# Altium PCB PCB.PcbDoc
Units mm, origin at the board's own origin, x right, y up, seen from the top; angles counter-clockwise.
Board outline 28 x 28 mm, 10 copper layers (Top, L2 (HS), L3 (GND), L4 (VCC), L5 (S), L6 S(), L7 (VCC), L8 (GND), L9 (VCC), Bottom), stack 1.141 mm thick; 137 components, 69 nets, 586 pads, 270 vias.
Unrouted connection lines stored in the file: 209.
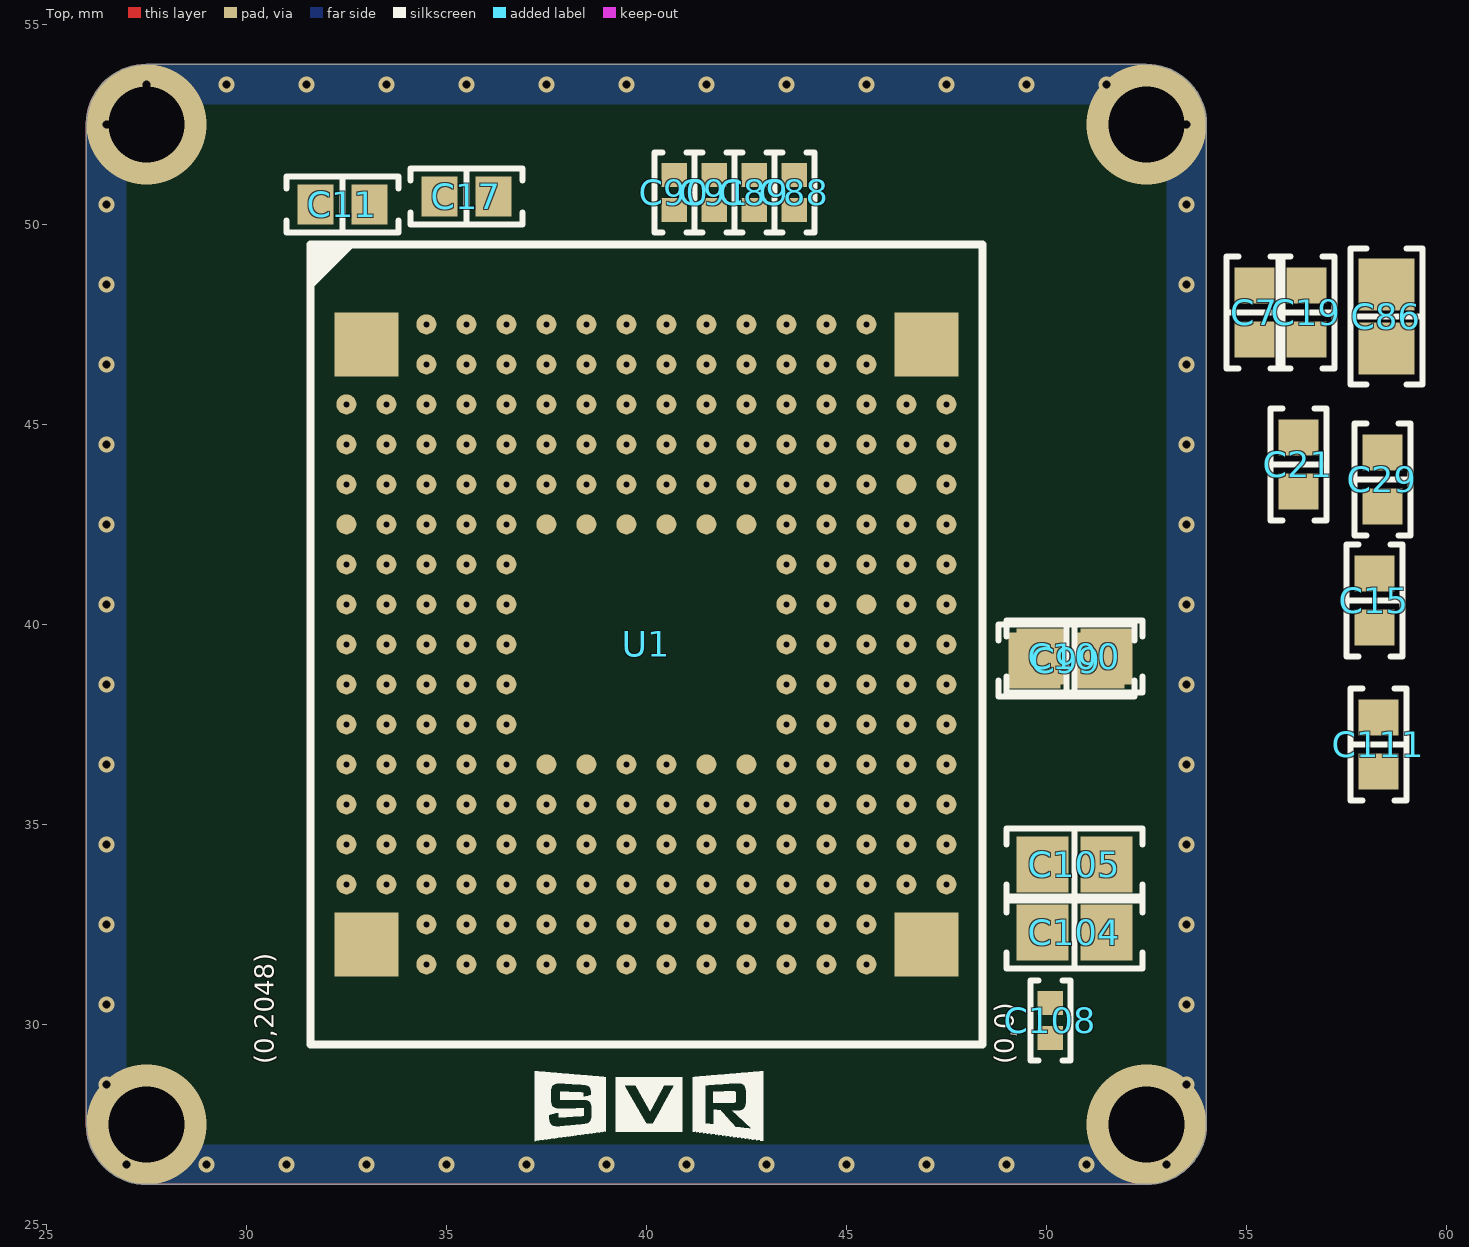
[diagram p0: Top view]
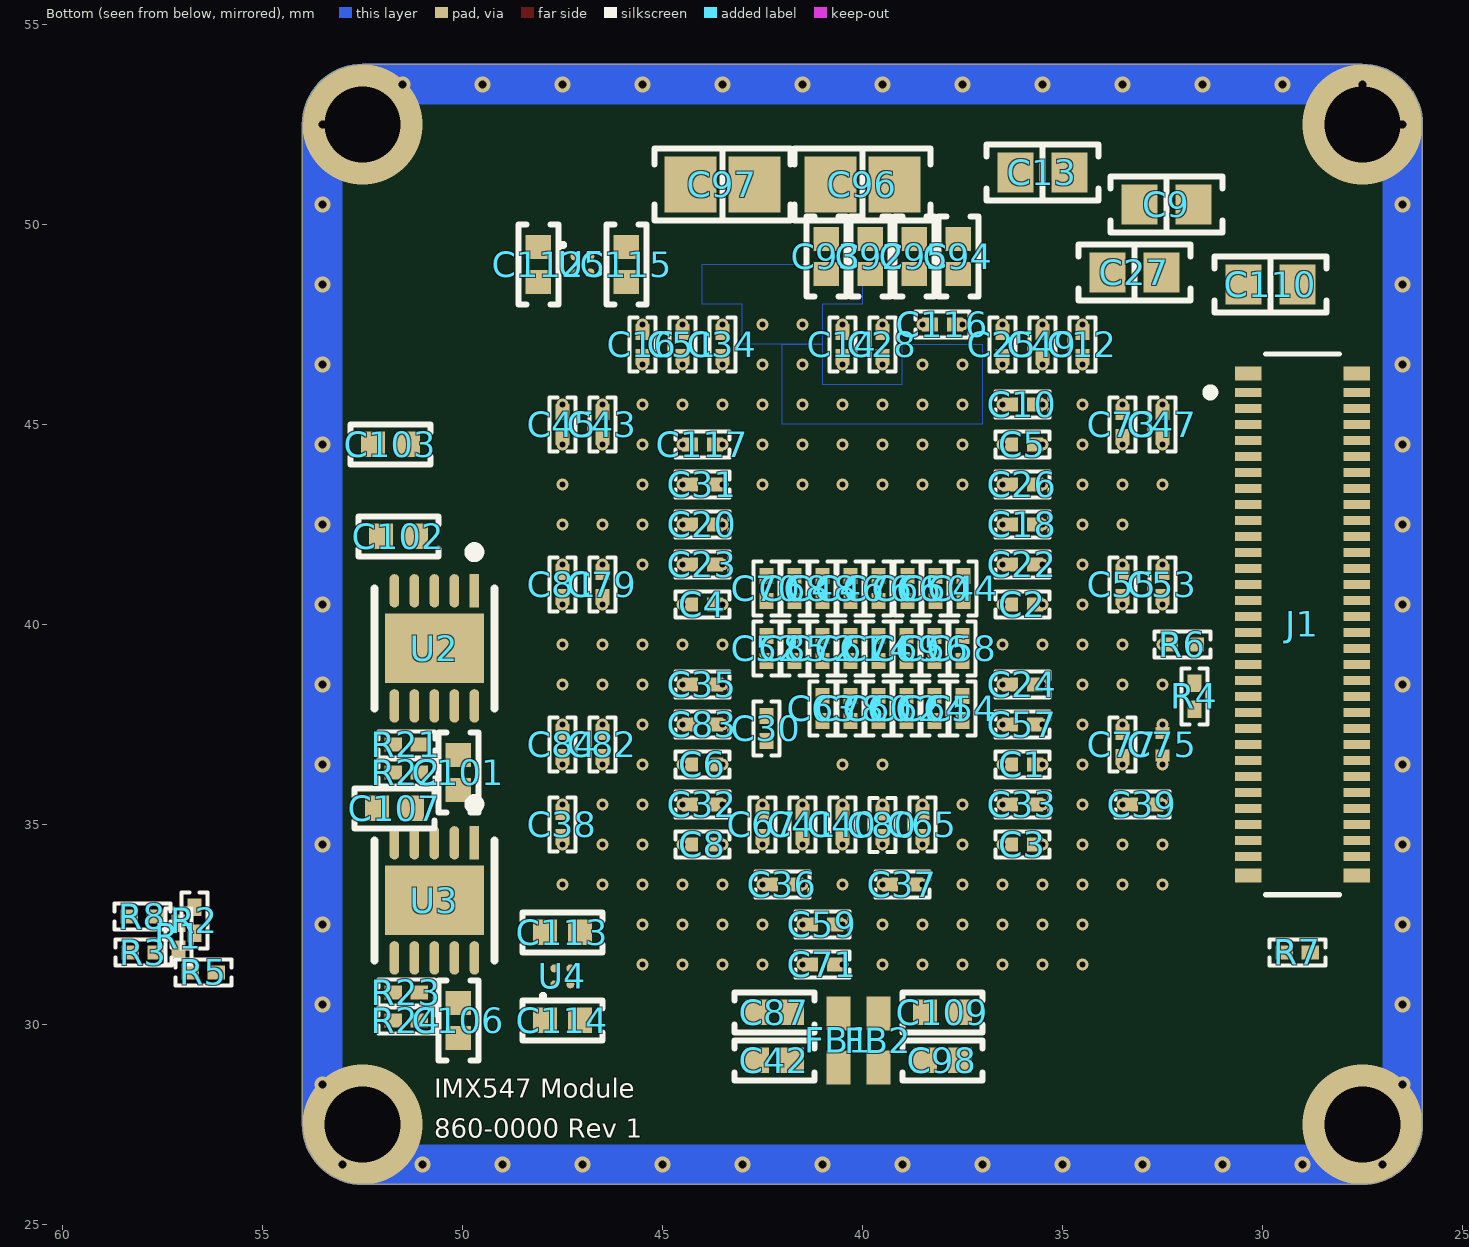
[diagram p1: Bottom view, seen from below]
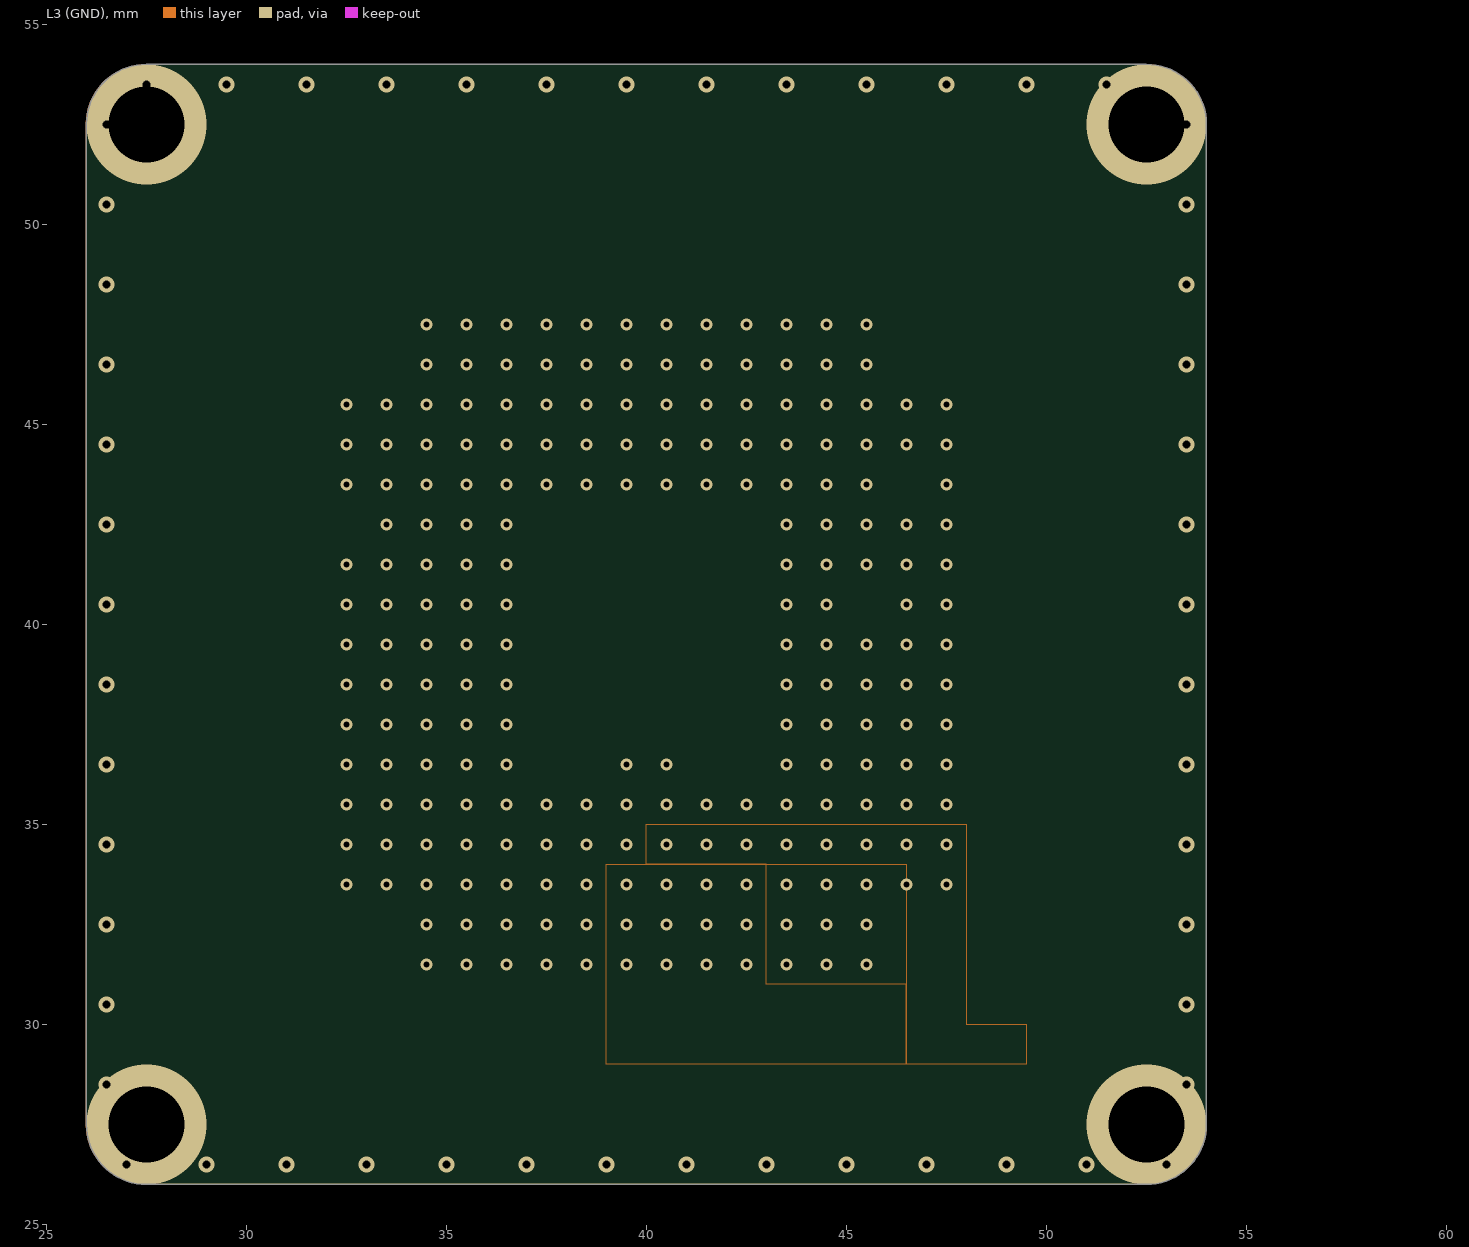
[diagram p2: L3 (GND)]

## Layer stack, top to bottom
Top Solder: solder mask 0.012, WE-SM-0001, Dk 3.5
Top: signal copper 0.035
Dielectric 1: prepreg 0.09, WE-PP-0034, Dk 4.6
L2 (HS): signal copper 0.0175
Dielectric 2: prepreg 0.127, WE-PP-0035, Dk 4.6
L3 (GND): signal copper 0.0175
Dielectric 8: prepreg 0.05, PP-006, Dk 4.6
L4 (VCC): signal copper 0.0175
Dielectric 3: prepreg 0.076, WE-PP-0035, Dk 4.6
L5 (S): signal copper 0.0175
Dielectric 6: core 0.25, Core-009, Dk 4.6
L6 S(): signal copper 0.0175
Dielectric 7: prepreg 0.076, PP-006, Dk 4.6
L7 (VCC): signal copper 0.0175
Dielectric 9: prepreg 0.05, PP-006, Dk 4.6
L8 (GND): signal copper 0.0175
Dielectric 4: prepreg 0.127, WE-PP-0035, Dk 4.6
L9 (VCC): signal copper 0.0175
Dielectric 5: prepreg 0.09, WE-PP-0034, Dk 4.6
Bottom: signal copper 0.03
Bottom Solder: solder mask 0.012, WE-SM-0001, Dk 3.5

## Board outline
26,27.5 26,52.5 cw(c27.5,52.5) 27.5,54 52.5,54 cw(c52.5,52.5) 54,52.5 54,27.5 cw(c52.5,27.5) 52.5,26 27.5,26 cw(c27.5,27.5)

## Design rules (kind name [scope] priority, off if disabled: settings)
Clearance Clearance_1 [All] p1: gap=0.1 ignorepadtopadclearanceinfootprint=TRUE except(0.35: Arc-Arc Arc-Track Track-Track)
Clearance [All] p2: gap=0.1 ignorepadtopadclearanceinfootprint=FALSE
DiffPairsRouting [All] p1: maxlimit=0.254 minlimit=0.127 mostfreqgap=0.254 toplayer_maxgap=0.127 toplayer_prefgap=0.127 toplayer_minwidth=0.156 toplayer_maxwidth=0.156 toplayer_prefwidth=0.156 midlayer1_mingap=0.13 midlayer1_maxgap=0.13 midlayer1_prefgap=0.13 midlayer1_minwidth=0.075 midlayer1_maxwidth=0.075 midlayer1_prefwidth=0.075 midlayer2_mingap=0.13 midlayer2_maxgap=0.13 midlayer2_prefgap=0.13 midlayer2_minwidth=0.075 midlayer2_maxwidth=0.075 midlayer2_prefwidth=0.075 midlayer3_minwidth=0.381 midlayer3_maxwidth=0.381 midlayer3_prefwidth=0.381 midlayer4_minwidth=0.381 midlayer4_maxwidth=0.381 midlayer4_prefwidth=0.381 midlayer5_minwidth=0.381 midlayer5_maxwidth=0.381 midlayer5_prefwidth=0.381 midlayer6_minwidth=0.381 midlayer6_maxwidth=0.381 midlayer6_prefwidth=0.381 midlayer7_minwidth=0.381 midlayer7_maxwidth=0.381 midlayer7_prefwidth=0.381 midlayer8_minwidth=0.381 midlayer8_maxwidth=0.381 midlayer8_prefwidth=0.381 bottomlayer_maxgap=0.127 bottomlayer_prefgap=0.127 bottomlayer_minwidth=0.156 bottomlayer_maxwidth=0.156 bottomlayer_prefwidth=0.156 impedanceprofiledriven=TRUE maxuncoupledlength=12.7
HoleToHoleClearance [IsMicroVia vs IsMicroVia] p1: gap=0.2 allowstackedmicrovias=FALSE
HoleToHoleClearance HoleToHoleClearance_1 [IsVia vs IsMicroVia] p2: gap=0.2 allowstackedmicrovias=FALSE
HoleToHoleClearance HoleToHoleClearance_2 [All] p3: gap=0.2 allowstackedmicrovias=FALSE
MinimumSolderMaskSliver [All] p1: minsoldermaskwidth=0.07
PlaneClearance PlaneClearance_1 [IsVia AND HoleDiameter > 1] p1: clearance=0.5
PlaneClearance [All] p2: clearance=0.1
PlaneConnect [All] p1: planeconnectstyle=Direct reliefexpansion=0.508 reliefentries=4 reliefconductorwidth=0.254 reliefairgap=0.254
PolygonConnect PolygonConnect_1 [HasFootprint('RES 0402_1005')] p1: thpad.connectstyle=Direct thpad.reliefconductorwidth=0.254 thpad.reliefentries=4 thpad.polygonreliefangle="90 Angle" thpad.airgapwidth=0.254 smdpad.connectstyle=Relief smdpad.reliefconductorwidth=0.1 smdpad.reliefentries=2 smdpad.polygonreliefangle="90 Angle" smdpad.airgapwidth=0.1 via.connectstyle=Direct via.reliefconductorwidth=0.254 via.reliefentries=4 via.polygonreliefangle="90 Angle" via.airgapwidth=0.254
PolygonConnect [All] p2: connectstyle=Direct reliefconductorwidth=0.254 reliefentries=4 polygonreliefangle="90 Angle" airgapwidth=0.254
RoutingVias RoutingVias_1 [IsMicroVia] p1: holewidth=0.1 width=0.3 viastyle="Through Hole" minholewidth=0.1 minwidth=0.3 maxholewidth=0.1 maxwidth=0.3
RoutingVias [All] p2: holewidth=0.15 width=0.3 viastyle="Through Hole" minholewidth=0.15 minwidth=0.3 maxholewidth=1.5 maxwidth=3
SMDNeckDown [All] p1: percent=50.000
SilkToSilkClearance [All] p1: silktosilkclearance=0.1
SilkToSolderMaskClearance [IsPad] p1: minsilkscreentomaskgap=0.1 clearancetoexposedcopper=TRUE
SolderMaskExpansion [All] p1: expansion=0.05 istentingtop=FALSE
Width [All] p1: maxlimit=0.5 minlimit=0.1 preferedwidth=0.1
23 further rules are at their usual default settings.

## Classes and differential pairs
differential pair class SLVSEC: D0 D1 D2 D3 D4 D5 D6 D7 DC
net class SLVSEC: D0_N D0_P D1_N D1_P D2_N D2_P D3_N D3_P D4_N D4_P D5_N D5_P D6_N D6_P D7_N D7_P DC_N DC_P
component class Misc: C88 C89 C90 C91 C92 C93 C94 C95
component class DigitalSupplies: C36 C37 C38 C39 C40 C41 C42 C43 C44 C45 C46 C47 C48 C49 C50 C51 C52 C53 C54 C55 C56 C57 C58 C59 C60 C61 C62 C63 C64 C65 C66 C67 C68 C69 C70 C71 C72 C73 C74 C75 C76 C77 C78 C79 C80 C81 C82 C83 C84 C85 C87 C98 C109 C110 C111 C112 C113 C114 C115 C116 C117 FB1 FB2 U4 U5
component class DigitalIO: J1 R1 R2 R3 R4 R5 R6 R7 R8
component class AnalogSupplies: C1 C2 C3 C4 C5 C6 C7 C8 C9 C10 C11 C12 C13 C14 C15 C16 C17 C18 C19 C20 C21 C22 C23 C24 C25 C26 C27 C28 C29 C30 C31 C32 C33 C34 C35 C86 C96 C97 C99 C100 C101 C102 C103 C104 C105 C106 C107 C108 R21 R22 R23 R24 U1 U2 U3
differential pair DC: +DC_P -DC_N
differential pair D7: +D7_P -D7_N
differential pair D6: +D6_P -D6_N
differential pair D5: +D5_P -D5_N
differential pair D4: +D4_P -D4_N
differential pair D3: +D3_P -D3_N
differential pair D2: +D2_P -D2_N
differential pair D1: +D1_P -D1_N
differential pair D0: +D0_P -D0_N

## Components (designator, comment, footprint, x,y, rotation, side; value= is the part's Value field where it differs from the comment)
C1 "2.2 µF" "CAP 0201_0603" 36,36.5 r0 bottom
C2 "2.2 µF" "CAP 0201_0603" 36,40.5 r0 bottom
C3 "2.2 µF" "CAP 0201_0603" 36,34.5 r0 bottom
C4 "2.2 µF" "CAP 0201_0603" 44,40.5 r180 bottom
C5 "2.2 µF" "CAP 0201_0603" 36,44.5 r0 bottom
C6 "2.2 µF" "CAP 0201_0603" 44,36.5 r180 bottom
C7 "10µF" "CAP 0603_1608" 55.2,47.8 r90 top
C8 "2.2 µF" "CAP 0201_0603" 44,34.5 r180 bottom
C9 "10µF" "CAP 0603_1608" 32.4,50.5 r0 bottom
C10 "2.2 µF" "CAP 0201_0603" 36,45.5 r0 bottom
C11 "10µF" "CAP 0603_1608" 32.4,50.5 r0 top
C12 "2.2 µF" "CAP 0201_0603" 34.5,47 r90 bottom
C13 "10µF" "CAP 0603_1608" 35.5,51.3 r0 bottom
C14 "2.2 µF" "CAP 0201_0603" 40.5,47 r90 bottom
C15 "10µF" "CAP 0603_1608" 58.2,40.6 r90 top
C16 "2.2 µF" "CAP 0201_0603" 45.5,47 r90 bottom
C17 "10µF" "CAP 0603_1608" 35.5,50.7 r0 top
C18 "2.2 µF" "CAP 0201_0603" 36,42.5 r0 bottom
C19 "10µF" "CAP 0603_1608" 56.5,47.8 r90 top
C20 "2.2 µF" "CAP 0201_0603" 44,42.5 r180 bottom
C21 "10µF" "CAP 0603_1608" 56.3,44 r90 top
C22 "2.2 µF" "CAP 0201_0603" 36,41.5 r0 bottom
C23 "2.2 µF" "CAP 0201_0603" 44,41.5 r180 bottom
C24 "2.2 µF" "CAP 0201_0603" 36,38.5 r0 bottom
C25 "2.2 µF" "CAP 0201_0603" 36.5,47 r90 bottom
C26 "2.2 µF" "CAP 0201_0603" 36,43.5 r0 bottom
C27 "10µF" "CAP 0603_1608" 33.2,48.8 r0 bottom
C28 "2.2 µF" "CAP 0201_0603" 39.5,47 r90 bottom
C29 "10µF" "CAP 0603_1608" 58.4,43.625 r90 top
C30 "2.2 µF" "CAP 0201_0603" 42.4,37.4 r90 bottom
C31 "2.2 µF" "CAP 0201_0603" 44,43.5 r180 bottom
C32 "2.2 µF" "CAP 0201_0603" 44,35.5 r180 bottom
C33 "2.2 µF" "CAP 0201_0603" 36,35.5 r0 bottom
C34 "2.2 µF" "CAP 0201_0603" 43.5,47 r90 bottom
C35 "2.2 µF" "CAP 0201_0603" 44,38.5 r180 bottom
C36 "2.2 µF" "CAP 0201_0603" 42,33.5 r180 bottom
C37 "2.2 µF" "CAP 0201_0603" 39,33.5 r0 bottom
C38 "2.2 µF" "CAP 0201_0603" 47.5,35 r90 bottom
C39 "2.2 µF" "CAP 0201_0603" 33,35.5 r180 bottom
C40 "2.2 µF" "CAP 0201_0603" 40.5,35 r270 bottom
C41 "2.2 µF" "CAP 0201_0603" 41.5,35 r270 bottom
C42 "10 µF" "CAP 0402_1005" 42.2,29.1 r180 bottom
C43 "2.2 µF" "CAP 0201_0603" 46.5,45 r90 bottom
C44 "2.2 µF" "CAP 0201_0603" 37.475,40.9 r90 bottom
C45 "2.2 µF" "CAP 0201_0603" 47.5,45 r90 bottom
C46 "2.2 µF" "CAP 0201_0603" 40.3,40.9 r90 bottom
C47 "2.2 µF" "CAP 0201_0603" 32.5,45 r90 bottom
C48 "2.2 µF" "CAP 0201_0603" 41,40.9 r90 bottom
C49 "2.2 µF" "CAP 0201_0603" 35.5,47 r90 bottom
C50 "2.2 µF" "CAP 0201_0603" 38.175,40.9 r90 bottom
C51 "2.2 µF" "CAP 0201_0603" 44.5,47 r90 bottom
C52 "2.2 µF" "CAP 0201_0603" 42.4,39.4 r270 bottom
C53 "2.2 µF" "CAP 0201_0603" 32.5,41 r90 bottom
C54 "2.2 µF" "CAP 0201_0603" 37.5,37.9 r90 bottom
C55 "2.2 µF" "CAP 0201_0603" 33.5,41 r90 bottom
C56 "2.2 µF" "CAP 0201_0603" 38.2,39.4 r270 bottom
C57 "2.2 µF" "CAP 0201_0603" 36,37.5 r0 bottom
C58 "2.2 µF" "CAP 0201_0603" 37.5,39.4 r270 bottom
C59 "2.2 µF" "CAP 0201_0603" 41,32.5 r180 bottom
C60 "2.2 µF" "CAP 0201_0603" 39.6,37.9 r90 bottom
C61 "2.2 µF" "CAP 0201_0603" 40.3,39.4 r270 bottom
C62 "2.2 µF" "CAP 0201_0603" 38.9,37.9 r90 bottom
C63 "2.2 µF" "CAP 0201_0603" 41,37.9 r270 bottom
C64 "2.2 µF" "CAP 0201_0603" 38.2,37.9 r90 bottom
C65 "2.2 µF" "CAP 0201_0603" 38.5,35 r270 bottom
C66 "2.2 µF" "CAP 0201_0603" 38.875,40.9 r90 bottom
C67 "2.2 µF" "CAP 0201_0603" 42.5,35 r270 bottom
C68 "2.2 µF" "CAP 0201_0603" 41.7,40.9 r90 bottom
C69 "2.2 µF" "CAP 0201_0603" 38.9,39.4 r270 bottom
C70 "2.2 µF" "CAP 0201_0603" 42.4,40.9 r90 bottom
C71 "2.2 µF" "CAP 0201_0603" 41,31.5 r180 bottom
C72 "2.2 µF" "CAP 0201_0603" 41,39.4 r270 bottom
C73 "2.2 µF" "CAP 0201_0603" 33.5,45 r90 bottom
C74 "2.2 µF" "CAP 0201_0603" 39.6,39.4 r270 bottom
C75 "2.2 µF" FP-GRM033-0_09-MFG 32.5,37 r90 bottom
C76 "2.2 µF" "CAP 0201_0603" 39.6,40.9 r90 bottom
C77 "2.2 µF" "CAP 0201_0603" 33.5,37 r90 bottom
C78 "2.2 µF" "CAP 0201_0603" 40.3,37.9 r90 bottom
C79 "2.2 µF" "CAP 0201_0603" 46.5,41 r90 bottom
C80 "2.2 µF" "CAP 0201_0603" 39.5,34.99 r270 bottom
C81 "2.2 µF" "CAP 0201_0603" 47.5,41 r90 bottom
C82 "2.2 µF" "CAP 0201_0603" 46.5,37 r90 bottom
C83 "2.2 µF" "CAP 0201_0603" 44,37.5 r180 bottom
C84 "2.2 µF" "CAP 0201_0603" 47.5,37 r90 bottom
C85 "2.2 µF" "CAP 0201_0603" 41.7,39.4 r270 bottom
C86 "22µF" "CAP 0805_2012" 58.5,47.7 r270 top
C87 "10 µF" "CAP 0402_1005" 42.2,30.3 r180 bottom
C88 "4.7µF" "CAP 0402_1005" 43.7,50.8 r270 top
C89 "4.7µF" "CAP 0402_1005" 42.7,50.8 r270 top
C90 "4.7µF" "CAP 0402_1005" 40.7,50.8 r270 top
C91 "4.7µF" "CAP 0402_1005" 41.7,50.8 r270 top
C92 "4.7µF" "CAP 0402_1005" 39.8,49.2 r270 bottom
C93 "4.7µF" "CAP 0402_1005" 40.9,49.2 r90 bottom
C94 "4.7µF" "CAP 0402_1005" 37.6,49.2 r270 bottom
C95 "4.7µF" "CAP 0402_1005" 38.7,49.2 r270 bottom
C96 "22µF" "CAP 0805_2012" 40,51 r0 bottom
C97 "22µF" "CAP 0805_2012" 43.5,51 r0 bottom
C98 "10 µF" "CAP 0402_1005" 38,29.1 r0 bottom
C99 "22µF" "CAP 0805_2012" 50.5,39.1 r0 top
C100 "22µF" "CAP 0805_2012" 50.7,39.2 r0 top
C101 "4.7µF" "CAP 0402_1005" 50.1,36.3 r90 bottom
C102 "4.7µF" "CAP 0402_1005" 51.6,42.2 r180 bottom
C103 "4.7µF" "CAP 0402_1005" 51.8,44.5 r0 bottom
C104 "22µF" "CAP 0805_2012" 50.7,32.3 r0 top
C105 "22µF" "CAP 0805_2012" 50.7,34 r0 top
C106 "4.7µF" "CAP 0402_1005" 50.1,30.1 r90 bottom
C107 "4.7µF" "CAP 0402_1005" 51.7,35.4 r180 bottom
C108 "4.7µF" "CAP 0402_1005" 50.1,30.1 r90 top
C109 "10 µF" "CAP 0402_1005" 38,30.3 r0 bottom
C110 "47 µF" "CAP 0603_1608" 29.8,48.5 r0 bottom
C111 "47 µF" "CAP 0603_1608" 58.3,37 r90 top
C112 "4.7µF" "CAP 0402_1005" 48.1,49 r90 bottom
C113 "4.7µF" "CAP 0402_1005" 47.5,32.3 r0 bottom
C114 "4.7µF" "CAP 0402_1005" 47.5,30.1 r0 bottom
C115 "4.7µF" "CAP 0402_1005" 45.9,49 r90 bottom
C116 "2.2 µF" "CAP 0201_0603" 38,47.5 r0 bottom
C117 "2.2 µF" "CAP 0201_0603" 44,44.5 r180 bottom
FB1 "742843122" "WE-CBF HF_0402_High Current" 40.6,29.6 r90 bottom
FB2 "742843122" "WE-CBF HF_0402_High Current" 39.6,29.6 r270 bottom
J1 "DF40C-60DP-0.4V(51)" HIROSE_DF40C-60DP-0.4V(51) 29,40 r270 bottom
R1 "10 kOhms" "RES 0201_0603" 57.1,32.2 r270 bottom
R2 "10 kOhms" "RES 0201_0603" 56.7,32.6 r270 bottom
R3 "10 Ohms" "RES 0201_0603" 57.975,31.8 r180 bottom
R4 "10 Ohms" "RES 0201_0603" 31.7,38.2 r270 bottom
R5 "10 Ohms" "RES 0201_0603" 56.475,31.3 r180 bottom
R6 "10 Ohms" "RES 0201_0603" 32,39.5 r180 bottom
R7 "10 Ohms" "RES 0201_0603" 29.125,31.8 r0 bottom
R8 "10 Ohms" "RES 0201_0603" 58,32.7 r0 bottom
R21 "35.7 kOhms" "RES 0201_0603" 51.4,37 r180 bottom
R22 "20.5 kOhms" "RES 0201_0603" 51.4,36.3 r0 bottom
R23 "267 kOhms" "RES 0201_0603" 51.4,30.8 r180 bottom
R24 "187 kOhms" "RES 0201_0603" 51.4,30.1 r0 bottom
U1 "IMX547" LGA230C100P16X17_1680X2000X260 40,39.5 r0 top
U2 "ADP7157ACPZ-04-R7" FP-CP-10-9-IPC_B 50.7,39.4 r270 bottom
U3 "ADP7157ACPZ-04-R7" FP-CP-10-9-IPC_B 50.7,33.1 r270 bottom
U4 "ADP151ACBZ-1.8-R7" ADI-CB-4-3 47.5,31.2 r90 bottom
U5 "ADP151ACBZ-1.1-R7" ADI-CB-4-3 47,49 r180 bottom

## Footprints (in the part's own frame and the unit in brackets; to place one, negate y for a bottom-side part, rotate by r counter-clockwise, add the part's x,y. Pads: shape width x height; smd on the part's side, far side on the other; paste and mask are expansions set on the pad)
ADI-CB-4-3 [mm] "BGA, 4-Balls, Body 0.76x0.76mm, Pitch 0.4mm"
  round 0.2 smd: A1(-0.2,0.2) A2(0.2,0.2) B1(-0.2,-0.2) B2(0.2,-0.2)
  silkscreen extent -0.53,0.44 -0.44,0.54, body extent -0.38,-0.38 0.38,0.38, height 0.66
"CAP 0201_0603" [mm] "Chip Capacitor, 2-Leads, Body 0.60x0.30mm, IPC Medium Density"
  rect 0.4x0.35 smd: 1(-0.31,0) 2(0.31,0)
  silkscreen extent -0.67,-0.33 0.67,0.33, body extent -0.3,-0.15 0.3,0.15, height 0.3
"CAP 0402_1005" [mm] "Chip Capacitor, 2-Leads, Body 1.02x0.51mm, IPC Medium Density"
  rect 0.6x0.64 smd: 1(-0.44,0) 2(0.44,0)
  silkscreen extent -1,-0.5 1,0.5, body extent -0.5,-0.26 0.5,0.26, height 0.52
"CAP 0603_1608" [mm] "Chip Capacitor, 2-Leads, Body 1.60x0.80mm, IPC Medium Density"
  rect 0.9x1 smd: 1(-0.675,0) 2(0.675,0)
  silkscreen extent -1.4,-0.7 1.4,0.7, body extent -0.8,-0.41 0.8,0.41, height 0.82
"CAP 0805_2012" [mm] "Chip Capacitor, 2-Leads, Body 2.00x1.20mm, IPC Medium Density"
  rect 1.3x1.4 smd: 1(-0.8,0) 2(0.8,0)
  silkscreen extent -1.7,-0.9 1.7,0.9, body extent -1,-0.64 1,0.64, height 1.26
FP-CP-10-9-IPC_B [mm]
  rect 0.836x0.242 smd paste+0 mask+0: 1(-1.438,1)
  rrect100% 0.836x0.242 smd paste+0 mask+0: 2(-1.438,0.5) 3(-1.438,0) 4(-1.438,-0.5) 5(-1.438,-1) 6(1.438,-1) 7(1.438,-0.5) 8(1.438,0) 9(1.438,0.5) 10(1.438,1)
  rect 1.74x2.48 smd paste-1000 mask+0: 11(0,0)
  silkscreen extent -2.53,-1.5 1.5,1.5, body extent -1.5,-1.5 1.5,1.5, height 0.8
FP-GRM033-0_09-MFG [mm]
  rect 0.3x0.35 smd paste+0 mask+0: 1(-0.282,0) 2(0.282,0)
  body extent -0.3,-0.15 0.3,0.15, height 0.39
HIROSE_DF40C-60DP-0.4V(51) [mm]
  rect 0.23x0.66 smd paste-1: 1(-5.8,-1.355) 2(-5.8,1.355) 3(-5.4,-1.355) 4(-5.4,1.355) 5(-5,-1.355) 6(-5,1.355) 7(-4.6,-1.355) 8(-4.6,1.355) 9(-4.2,-1.355) 10(-4.2,1.355) 11(-3.8,-1.355) 12(-3.8,1.355) 13(-3.4,-1.355) 14(-3.4,1.355) 15(-3,-1.355) 16(-3,1.355) 17(-2.6,-1.355) 18(-2.6,1.355) 19(-2.2,-1.355) 20(-2.2,1.355) 21(-1.8,-1.355) 22(-1.8,1.355) 23(-1.4,-1.355) 24(-1.4,1.355) 25(-1,-1.355) 26(-1,1.355) 27(-0.6,-1.355) 28(-0.6,1.355) 29(-0.2,-1.355) 30(-0.2,1.355) 31(0.2,-1.355) 32(0.2,1.355) 33(0.6,-1.355) 34(0.6,1.355) 35(1,-1.355) 36(1,1.355) 37(1.4,-1.355) 38(1.4,1.355) 39(1.8,-1.355) 40(1.8,1.355) 41(2.2,-1.355) 42(2.2,1.355) 43(2.6,-1.355) 44(2.6,1.355) 45(3,-1.355) 46(3,1.355) 47(3.4,-1.355) 48(3.4,1.355) 49(3.8,-1.355) 50(3.8,1.355) 51(4.2,-1.355) 52(4.2,1.355) 53(4.6,-1.355) 54(4.6,1.355) 55(5,-1.355) 56(5,1.355) 57(5.4,-1.355) 58(5.4,1.355) 59(5.8,-1.355) 60(5.8,1.355)
  rect 0.35x0.66 smd paste-1: S1(-6.275,-1.355) S2(-6.275,1.355) S3(6.275,-1.355) S4(6.275,1.355)
  silkscreen extent -6.76,-2.4 6.76,0.92
LGA230C100P16X17_1680X2000X260 [mm] "LGA, 230-Leads, Body 16.80x20.00mmx2.60mm, Pitch 1.00mm"
  rect 1.6x1.6 smd: A1(-7,7.5) A16(7,7.5) U1(-7,-7.5) U16(7,-7.5)
  round 0.5 smd: A3(-5.5,8) A4(-4.5,8) A5(-3.5,8) A6(-2.5,8) A7(-1.5,8) A8(-0.5,8) A9(0.5,8) A10(1.5,8) A11(2.5,8) A12(3.5,8) A13(4.5,8) A14(5.5,8) B3(-5.5,7) B4(-4.5,7) B5(-3.5,7) B6(-2.5,7) B7(-1.5,7) B8(-0.5,7) B9(0.5,7) B10(1.5,7) B11(2.5,7) B12(3.5,7) B13(4.5,7) B14(5.5,7) C1(-7.5,6) C2(-6.5,6) C3(-5.5,6) C4(-4.5,6) C5(-3.5,6) C6(-2.5,6) C7(-1.5,6) C8(-0.5,6) C9(0.5,6) C10(1.5,6) C11(2.5,6) C12(3.5,6) C13(4.5,6) C14(5.5,6) C15(6.5,6) C16(7.5,6) D1(-7.5,5) D2(-6.5,5) D3(-5.5,5) D4(-4.5,5) D5(-3.5,5) D6(-2.5,5) D7(-1.5,5) D8(-0.5,5) D9(0.5,5) D10(1.5,5) D11(2.5,5) D12(3.5,5) D13(4.5,5) D14(5.5,5) D15(6.5,5) D16(7.5,5) E1(-7.5,4) E2(-6.5,4) E3(-5.5,4) E4(-4.5,4) E5(-3.5,4) E6(-2.5,4) E7(-1.5,4) E8(-0.5,4) E9(0.5,4) E10(1.5,4) E11(2.5,4) E12(3.5,4) E13(4.5,4) E14(5.5,4) E15(6.5,4) E16(7.5,4) F1(-7.5,3) F2(-6.5,3) F3(-5.5,3) F4(-4.5,3) F5(-3.5,3) F6(-2.5,3) F7(-1.5,3) F8(-0.5,3) F9(0.5,3) F10(1.5,3) F11(2.5,3) F12(3.5,3) F13(4.5,3) F14(5.5,3) F15(6.5,3) F16(7.5,3) G1(-7.5,2) G2(-6.5,2) G3(-5.5,2) G4(-4.5,2) G5(-3.5,2) G12(3.5,2) G13(4.5,2) G14(5.5,2) G15(6.5,2) G16(7.5,2) H1(-7.5,1) H2(-6.5,1) H3(-5.5,1) H4(-4.5,1) H5(-3.5,1) H12(3.5,1) H13(4.5,1) H14(5.5,1) H15(6.5,1) H16(7.5,1) J1(-7.5,0) J2(-6.5,0) J3(-5.5,0) J4(-4.5,0) J5(-3.5,0) J12(3.5,0) J13(4.5,0) J14(5.5,0) J15(6.5,0) J16(7.5,0) K1(-7.5,-1) K2(-6.5,-1) K3(-5.5,-1) K4(-4.5,-1) K5(-3.5,-1) K12(3.5,-1) K13(4.5,-1) K14(5.5,-1) K15(6.5,-1) K16(7.5,-1) L1(-7.5,-2) L2(-6.5,-2) L3(-5.5,-2) L4(-4.5,-2) L5(-3.5,-2) L12(3.5,-2) L13(4.5,-2) L14(5.5,-2) L15(6.5,-2) L16(7.5,-2) M1(-7.5,-3) M2(-6.5,-3) M3(-5.5,-3) M4(-4.5,-3) M5(-3.5,-3) M6(-2.5,-3) M7(-1.5,-3) M8(-0.5,-3) M9(0.5,-3) M10(1.5,-3) M11(2.5,-3) M12(3.5,-3) M13(4.5,-3) M14(5.5,-3) M15(6.5,-3) M16(7.5,-3) N1(-7.5,-4) N2(-6.5,-4) N3(-5.5,-4) N4(-4.5,-4) N5(-3.5,-4) N6(-2.5,-4) N7(-1.5,-4) N8(-0.5,-4) N9(0.5,-4) N10(1.5,-4) N11(2.5,-4) N12(3.5,-4) N13(4.5,-4) N14(5.5,-4) N15(6.5,-4) N16(7.5,-4) P1(-7.5,-5) P2(-6.5,-5) P3(-5.5,-5) P4(-4.5,-5) P5(-3.5,-5) P6(-2.5,-5) P7(-1.5,-5) P8(-0.5,-5) P9(0.5,-5) P10(1.5,-5) P11(2.5,-5) P12(3.5,-5) P13(4.5,-5) P14(5.5,-5) P15(6.5,-5) P16(7.5,-5) R1(-7.5,-6) R2(-6.5,-6) R3(-5.5,-6) R4(-4.5,-6) R5(-3.5,-6) R6(-2.5,-6) R7(-1.5,-6) R8(-0.5,-6) R9(0.5,-6) R10(1.5,-6) R11(2.5,-6) R12(3.5,-6) R13(4.5,-6) R14(5.5,-6) R15(6.5,-6) R16(7.5,-6) T3(-5.5,-7) T4(-4.5,-7) T5(-3.5,-7) T6(-2.5,-7) T7(-1.5,-7) T8(-0.5,-7) T9(0.5,-7) T10(1.5,-7) T11(2.5,-7) T12(3.5,-7) T13(4.5,-7) T14(5.5,-7) U3(-5.5,-8) U4(-4.5,-8) U5(-3.5,-8) U6(-2.5,-8) U7(-1.5,-8) U8(-0.5,-8) U9(0.5,-8) U10(1.5,-8) U11(2.5,-8) U12(3.5,-8) U13(4.5,-8) U14(5.5,-8)
  silkscreen extent -8.4,-10 8.4,10, body extent -8.4,-10 8.4,10, height 2.6
"RES 0201_0603" [mm] "Chip Resistor, 2-Leads, Body 0.60x0.30mm, IPC Medium Density"
  rect 0.44x0.35 smd: 1(-0.325,0) 2(0.325,0)
  silkscreen extent -0.7,-0.33 0.7,0.33, body extent -0.3,-0.15 0.3,0.15, height 0.21
"WE-CBF HF_0402_High Current" [mm] "SMD EMI Suppression Ferrite  Bead, body 1.00x0.50mm"
  rect 0.85x0.6 smd: 1(-0.675,0) 2(0.675,0)
  body extent -0.5,-0.25 0.5,0.25, height 0.5

## Part data
C1 C2 C3 C4 C5 C6 C8 C10 C12 C14 C16 C18 C20 C22 C23 C24 C25 C26 C28 C30 C31 C32 C33 C34 C35 C36 C37 C38 C39 C40 C41 C43 C44 C45 C46 C47 C48 C49 C50 C51 C52 C53 C54 C55 C56 C57 C58 C59 C60 C61 C62 C63 C64 C65 C66 C67 C68 C69 C70 C71 C72 C73 C74 C75 C76 C77 C78 C79 C80 C81 C82 C83 C84 C85 C116 C117: library part GRM033R60J225ME01D, "CAP CER 2.2UF 6.3V X5R 0201", Device Package="0201 (0603 Metric)", Manufacturer="Murata Electronics", Operating Temperature="-55°C ~ 85°C", Supplier Part Number 1=490-GRM033R60J225ME01DCT-ND, Temperature Coefficient=X5R, Tolerance=±20%, Voltage - Rated=6.3V, Applications="General Purpose", Capacitance="2.2 µF", ComponentLink1Description=Datasheet, ComponentLink1URL=https://search.murata.co.jp/Ceramy/image/img/A01X/G101/ENG/GRM033R60J225ME01-01A.pdf, ComponentLink2Description="DigiKey Link", ComponentLink2URL=https://www.digikey.com/en/products/detail/murata-electronics/GRM033R60J225ME01D/16033628, LastUpdated="19.09.2022 12:54:17", Lifecycle Status=Active, Minimum Order=1, Mounting Type="Surface Mount, MLCC", Package / Case="0201 (0603 Metric)", Packaging=TapeAndReel, Part Number=GRM033R60J225ME01D, Part Status=Active, PartId=41005, Price=0.02, Series=GRM, Size / Dimension="0.024\" L x 0.012\" W (0.60mm x 0.30mm)", Supplier 1=DigiKey, Thickness (Max)="0.015\" (0.39mm)"
C7 C9 C11 C13 C15 C17 C19 C21 C27 C29: library part GRM188R61A106MAALD, "CAP CER 10UF 10V X5R 0603", Device Package="0603 (1608 Metric)", Manufacturer="Murata Electronics", Operating Temperature="-55°C ~ 85°C", Supplier Part Number 1=490-12734-1-ND, Temperature Coefficient=X5R, Tolerance=±20%, Voltage - Rated=10V, Applications="General Purpose", Capacitance=10µF, ComponentLink1Description=Datasheet, ComponentLink1URL=https://search.murata.co.jp/Ceramy/image/img/A01X/G101/ENG/GRM188R61A106MAAL-01.pdf, ComponentLink2Description="DigiKey Link", ComponentLink2URL=http://digikey.com/product-detail/en/murata-electronics/GRM188R61A106MAALD/490-12734-1-ND/5797703, LastUpdated="9/2/2020 1:03:35 AM", Lifecycle Status=Active, Minimum Order=1, Mounting Type="Surface Mount, MLCC", Package / Case="0603 (1608 Metric)", Packaging=TapeAndReel, Part Number=GRM188R61A106MAALD, Part Status=Active, PartId=2423, Price=0.08, Series=GRM, Size / Dimension="0.063\" L x 0.031\" W (1.60mm x 0.80mm)", Supplier 1=DigiKey, Thickness (Max)="0.037\" (0.95mm)"
C42 C87 C98 C109: library part GRM155R60J106ME15D, "CAP CER 10UF 6.3V X5R 0402", Device Package="0402 (1005 Metric)", Manufacturer="Murata Electronics", Operating Temperature="-55°C ~ 85°C", Supplier Part Number 1=490-13238-1-ND, Temperature Coefficient=X5R, Tolerance=±20%, Voltage - Rated=6.3V, Applications="General Purpose", Capacitance="10 µF", ComponentLink1Description=Datasheet, ComponentLink1URL=https://www.murata.com/~/media/webrenewal/support/library/catalog/products/capacitor/mlcc/c02e.ashx?la=en-us, ComponentLink2Description="DigiKey Link", ComponentLink2URL=https://www.digikey.com/en/products/detail/murata-electronics/GRM155R60J106ME15D/5877401, LastUpdated="19.09.2022 12:57:20", Lifecycle Status=Active, Minimum Order=1, Mounting Type="Surface Mount, MLCC", Package / Case="0402 (1005 Metric)", Packaging=TapeAndReel, Part Number=GRM155R60J106ME15D, Part Status=Active, PartId=6754, Price=0.02, Series=GRM, Size / Dimension="0.039\" L x 0.020\" W (1.00mm x 0.50mm)", Supplier 1=DigiKey, Thickness (Max)="0.026\" (0.65mm)"
C86 C96 C97 C99 C100 C104 C105: library part GRM21BR61A226ME44L, "CAP CER 22UF 10V X5R 0805", Device Package="0805 (2012 Metric)", Manufacturer="Murata Electronics", Operating Temperature="-55°C ~ 85°C", Supplier Part Number 1=490-10746-1-ND, Temperature Coefficient=X5R, Tolerance=±20%, Voltage - Rated=10V, Applications="General Purpose", Capacitance=22µF, ComponentLink1Description=Datasheet, ComponentLink1URL=https://search.murata.co.jp/Ceramy/image/img/A01X/G101/ENG/GRM21BR61A226ME44-01.pdf, ComponentLink2Description="DigiKey Link", ComponentLink2URL=http://digikey.com/product-detail/en/murata-electronics/GRM21BR61A226ME44L/490-10746-1-ND/5251354, LastUpdated="9/2/2020 1:04:36 AM", Lifecycle Status=Active, Minimum Order=1, Mounting Type="Surface Mount, MLCC", Package / Case="0805 (2012 Metric)", Packaging=TapeAndReel, Part Number=GRM21BR61A226ME44L, Part Status=Active, PartId=6027, Price=0.12, Series=GRM, Size / Dimension="0.079\" L x 0.049\" W (2.00mm x 1.25mm)", Supplier 1=DigiKey, Thickness (Max)="0.057\" (1.45mm)"
C88 C89 C90 C91 C92 C93 C94 C95 C101 C102 C103 C106 C107 C108 C112 C113 C114 C115: library part GRM155R61A475MEAAD, "CAP CER 4.7UF 10V X5R 0402", Device Package="0402 (1005 Metric)", Manufacturer="Murata Electronics", Operating Temperature="-55°C ~ 85°C", Supplier Part Number 1=490-14306-1-ND, Temperature Coefficient=X5R, Tolerance=±20%, Voltage - Rated=10V, Applications="General Purpose", Capacitance=4.7µF, ComponentLink1Description=Datasheet, ComponentLink1URL=https://search.murata.co.jp/Ceramy/image/img/A01X/G101/ENG/GRM155R61A475MEAA-01.pdf, ComponentLink2Description="DigiKey Link", ComponentLink2URL=https://www.digikey.com/en/products/detail/murata-electronics/GRM155R61A475MEAAD/6234735, LastUpdated="2/8/2022 12:26:50 PM", Lifecycle Status=Active, Minimum Order=1, Mounting Type="Surface Mount, MLCC", Package / Case="0402 (1005 Metric)", Packaging=TapeAndReel, Part Number=GRM155R61A475MEAAD, Part Status=Active, PartId=6746, Price=0.03, Series=GRM, Size / Dimension="0.039\" L x 0.020\" W (1.00mm x 0.50mm)", Supplier 1=DigiKey, Thickness (Max)="0.026\" (0.65mm)"
C110 C111: library part GRM188R60J476ME01D, "CAP CER 47UF 6.3V X5R 0603", Device Package="0603 (1608 Metric)", Manufacturer="Murata Electronics", Operating Temperature="-55°C ~ 85°C", Supplier Part Number 1=490-GRM188R60J476ME01DCT-ND, Temperature Coefficient=X5R, Tolerance=±20%, Voltage - Rated=6.3V, Applications="General Purpose", Capacitance="47 µF", ComponentLink2Description="DigiKey Link", ComponentLink2URL=https://www.digikey.com/en/products/detail/murata-electronics/GRM188R60J476ME01D/13996874, LastUpdated="5/20/2022 2:38:45 PM", Lifecycle Status=Active, Minimum Order=1, Mounting Type="Surface Mount, MLCC", Package / Case="0603 (1608 Metric)", Packaging=TapeAndReel, Part Number=GRM188R60J476ME01D, Part Status=Active, PartId=44498, Price=0.10, Series=GRM, Size / Dimension="0.063\" L x 0.031\" W (1.60mm x 0.80mm)", Supplier 1=DigiKey, Thickness (Max)="0.039\" (1.00mm)"
FB1 FB2: library part CMP-015-000002-1, "WE-CBF HF SMT High Frequency EMI Suppression Ferrite Bead, size 0402, 220O, 0.8A", Case/Size Code=0402, DC Resistance=0.25O, Manufacturer="Wurth Elektronik", Operating Temperature Max=125°C, Operating Temperature Min=-55°C, Rated Current=0.8A, Category="Ferrites for PCB Assembly", Component Type=Standard, ComponentLink1Description="Website Link", ComponentLink1URL=https://www.we-online.com/redexpert/article/742843122?ad, ComponentLink2Description="Datasheet Link", ComponentLink2URL=https://www.we-online.com/redexpert/spec/742843122?ad, Design Item ID=742843122, Height=0.5mm, Impedance @1GHz=300O, Impedance @100MHz=220O, Impedance Max=400O, Impedance Max Test Condition=750MHz, Length=1mm, Manufacturer Part Number=742843122, Match Code="WE-CBF HF", Mount="Surface Mount", Packaging="Tape and Reel", Pin Count=2, Source="WE-CBF HF.SchLib", Type="High Current", Width=0.5mm
J1: "60 Position Connector Plug, Outer Shroud Contacts Surface Mount Gold", Package=None, Availability=Unavailable, MF="{'manufacturer': u'Hirose Electric'}", MP=DF40C-60DP-0.4V(51), Price=None
R1 R2: library part RMCF0201JG10K0, "RES 10K OHM 5% 1/20W 0201", Device Package="0201 (0603 Metric)", Manufacturer="Stackpole Electronics Inc", Operating Temperature="-55°C ~ 155°C", Power (Watts)="0.05W, 1/20W", Ratings=AEC-Q200, Supplier Device Package=0201, Supplier Part Number 1=RMCF0201JG10K0CT-ND, Temperature Coefficient=±200ppm/°C, Tolerance=±5%, ComponentLink1Description=Datasheet, ComponentLink1URL=https://www.seielect.com/catalog/sei-rmcf_rmcp.pdf, ComponentLink2Description="DigiKey Link", ComponentLink2URL=https://www.digikey.com/en/products/detail/stackpole-electronics-inc/RMCF0201JG10K0/6053790, Composition="Thick Film", Height - Seated (Max)="0.010\" (0.26mm)", LastUpdated="19.09.2022 13:09:10", Lifecycle Status=Active, Minimum Order=1, Number of Terminations=2, Package / Case="0201 (0603 Metric)", Packaging=CutTape, Part Number=RMCF0201JG10K0, Part Status=Active, PartId=1335, Price=0.01, Resistance="10 kOhms", Series=RMCF, Size / Dimension="0.024\" L x 0.012\" W (0.60mm x 0.30mm)", Supplier 1=DigiKey
R3 R4 R5 R6 R7 R8: library part CRG0201F10R, "RES SMD 10 OHM 1% 1/20W 0201", Device Package="0201 (0603 Metric)", Manufacturer="TE Connectivity Passive Product", Operating Temperature="-55°C ~ 155°C", Power (Watts)="0.05W, 1/20W", Supplier Device Package=0201, Supplier Part Number 1=A129573CT-ND, Temperature Coefficient=±400ppm/°C, Tolerance=±1%, ComponentLink1Description=Datasheet, ComponentLink1URL=https://www.te.com/commerce/DocumentDelivery/DDEController?Action=srchrtrv&DocNm=1773204&DocType=DS&DocLang=English, ComponentLink2Description="DigiKey Link", ComponentLink2URL=https://www.digikey.com/en/products/detail/te-connectivity-passive-product/CRG0201F10R/4489648, Composition="Thick Film", Height - Seated (Max)="0.010\" (0.26mm)", LastUpdated="8/11/2022 9:03:27 AM", Lifecycle Status=Active, Minimum Order=1, Number of Terminations=2, Package / Case="0201 (0603 Metric)", Packaging=TapeAndReel, Part Number=CRG0201F10R, Part Status=Active, PartId=3, Price=0.03, Resistance="10 Ohms", Series="CRG, Neohm", Size / Dimension="0.024\" L x 0.012\" W (0.60mm x 0.30mm)", Supplier 1=DigiKey
R21: library part ERJ-1GNF3572C, "RES SMD 35.7K OHM 1% 1/20W 0201", Device Package="0201 (0603 Metric)", Manufacturer="Panasonic Electronic Components", Operating Temperature="-55°C ~ 125°C", Power (Watts)="0.05W, 1/20W", Ratings=AEC-Q200, Supplier Device Package=0201, Supplier Part Number 1=P122958CT-ND, Temperature Coefficient=±200ppm/°C, Tolerance=±1%, ComponentLink1Description=Datasheet, ComponentLink1URL=https://industrial.panasonic.com/cdbs/www-data/pdf/RDA0000/AOA0000C304.pdf, ComponentLink2Description="DigiKey Link", ComponentLink2URL=https://www.digikey.com/en/products/detail/panasonic-electronic-components/ERJ-1GNF3572C/2036287, Composition="Thick Film", Features="Automotive AEC-Q200", Height - Seated (Max)="0.010\" (0.26mm)", LastUpdated="5/20/2022 2:48:18 PM", Lifecycle Status=Active, Minimum Order=1, Number of Terminations=2, Package / Case="0201 (0603 Metric)", Packaging=TapeAndReel, Part Number=ERJ-1GNF3572C, Part Status=Active, PartId=448, Price=0.01, Resistance="35.7 kOhms", Series=ERJ-1GN, Size / Dimension="0.024\" L x 0.012\" W (0.60mm x 0.30mm)", Supplier 1=DigiKey
R22: library part ERJ-1GNF2052C, "RES SMD 20.5K OHM 1% 1/20W 0201", Device Package="0201 (0603 Metric)", Manufacturer="Panasonic Electronic Components", Operating Temperature="-55°C ~ 125°C", Power (Watts)="0.05W, 1/20W", Ratings=AEC-Q200, Supplier Device Package=0201, Supplier Part Number 1=P122817CT-ND, Temperature Coefficient=±200ppm/°C, Tolerance=±1%, ComponentLink1Description=Datasheet, ComponentLink1URL=https://industrial.panasonic.com/cdbs/www-data/pdf/RDA0000/AOA0000C304.pdf, ComponentLink2Description="DigiKey Link", ComponentLink2URL=http://digikey.com/product-detail/en/panasonic-electronic-components/ERJ-1GNF2052C/P122817CT-ND/8342573, Composition="Thick Film", Features="Automotive AEC-Q200", Height - Seated (Max)="0.010\" (0.26mm)", LastUpdated="5/20/2022 2:47:55 PM", Lifecycle Status=Active, Minimum Order=1, Number of Terminations=2, Package / Case="0201 (0603 Metric)", Packaging=TapeAndReel, Part Number=ERJ-1GNF2052C, Part Status=Active, PartId=4106, Price=0.01, Resistance="20.5 kOhms", Series=ERJ, Size / Dimension="0.024\" L x 0.012\" W (0.60mm x 0.30mm)", Supplier 1=DigiKey
R23: library part RC0201FR-07267KL, "RES 267K OHM 1% 1/20W 0201", Device Package="0201 (0603 Metric)", Manufacturer=Yageo, Operating Temperature="-55°C ~ 125°C", Power (Watts)="0.05W, 1/20W", Supplier Device Package=0201, Supplier Part Number 1=YAG2542CT-ND, Temperature Coefficient=±200ppm/°C, Tolerance=±1%, ComponentLink1Description=Datasheet, ComponentLink1URL=https://www.yageo.com/upload/media/product/productsearch/datasheet/rchip/PYu-RC_Group_51_RoHS_L_10.pdf, ComponentLink2Description="DigiKey Link", ComponentLink2URL=https://www.digikey.com/en/products/detail/yageo/RC0201FR-07267KL/5280402, Composition="Thick Film", Features="Moisture Resistant", Height - Seated (Max)="0.010\" (0.26mm)", LastUpdated="5/20/2022 2:48:07 PM", Lifecycle Status=Active, Minimum Order=1, Number of Terminations=2, Package / Case="0201 (0603 Metric)", Packaging=CutTape, Part Number=RC0201FR-07267KL, Part Status=Active, PartId=1831, Price=0.01, Resistance="267 kOhms", Series=RC_L, Size / Dimension="0.024\" L x 0.012\" W (0.60mm x 0.30mm)", Supplier 1=DigiKey
R24: library part ERJ-1GNF1873C, "RES SMD 187K OHM 1% 1/20W 0201", Device Package="0201 (0603 Metric)", Manufacturer="Panasonic Electronic Components", Operating Temperature="-55°C ~ 125°C", Power (Watts)="0.05W, 1/20W", Ratings=AEC-Q200, Supplier Device Package=0201, Supplier Part Number 1=P122798CT-ND, Temperature Coefficient=±200ppm/°C, Tolerance=±1%, ComponentLink1Description=Datasheet, ComponentLink1URL=https://industrial.panasonic.com/cdbs/www-data/pdf/RDA0000/AOA0000C304.pdf, ComponentLink2Description="DigiKey Link", ComponentLink2URL=https://www.digikey.com/en/products/detail/panasonic-electronic-components/ERJ-1GNF1873C/2036369, Composition="Thick Film", Features="Automotive AEC-Q200", Height - Seated (Max)="0.010\" (0.26mm)", LastUpdated="5/20/2022 2:48:21 PM", Lifecycle Status=Active, Minimum Order=1, Number of Terminations=2, Package / Case="0201 (0603 Metric)", Packaging=TapeAndReel, Part Number=ERJ-1GNF1873C, Part Status=Active, PartId=70, Price=0.01, Resistance="187 kOhms", Series=ERJ-1GN, Size / Dimension="0.024\" L x 0.012\" W (0.60mm x 0.30mm)", Supplier 1=DigiKey
U1: library part CMP-001-0000-4, "Sony IMX547 sensor"
U2 U3: library part CMP-019-00054-1, "LDO Regulator Pos 1.2V to 3.3V 1.2A 10-Pin LFCSP EP T/R"
U4: library part CMP-0786-00016-1, "Ultralow Noise, 200 mA, CMOS Linear Regulator, 2.2 to 5.5 V Vin, 1.8 V Vout, Industrial, 4-pin BGA (CB-4-3), Reel", Manufacturer="Analog Devices", Preset Vout Values (V)=1.8, Supply Current IGND @ Small Load=10uA, ComponentLink1Description="Manufacturer URL", ComponentLink1URL=http://www.analog.com/en/index.html, ComponentLink2Description=Datasheet, ComponentLink2URL=http://www.analog.com/static/imported-files/data_sheets/ADP151.pdf, ComponentLink3Description="Package Specification", ComponentLink3URL=http:/www.analog.com/static/imported-files/packages/PKG_PDF/WLCSP(CB)/CB_4_3.pdf, ComponentLink4Description="URL Link1", ComponentLink4URL="Product URL:http://www.analog.com/en/ADP151/productSearch.html", DatasheetVersion="Rev. E", Iout max=200mA, Mounting Technology="Surface Mount", PackageDescription="4-Ball Wafer Level Chip Scale Package, Body 0.76 x 0.76 mm, Pitch 0.4 mm", PackageReference=CB-4-3, PackageVersion="011409-A, 01/2009", Packing=Reel, partnumber=ADP151ACBZ-1.8-R7, Vin (max) (V)=5.5, Vin (min) (V)=2.2
U5: library part CMP-0786-00003-1, "Ultralow Noise, 200 mA, CMOS Linear Regulator, 2.2 to 5.5 V Vin, 1.1 V Vout, Industrial, 4-pin BGA (CB-4-3), Reel", Manufacturer="Analog Devices", Preset Vout Values (V)=1.1, Supply Current IGND @ Small Load=10uA, ComponentLink1Description="Manufacturer URL", ComponentLink1URL=http://www.analog.com/en/index.html, ComponentLink2Description=Datasheet, ComponentLink2URL=http://www.analog.com/static/imported-files/data_sheets/ADP151.pdf, ComponentLink3Description="Package Specification", ComponentLink3URL=http:/www.analog.com/static/imported-files/packages/PKG_PDF/WLCSP(CB)/CB_4_3.pdf, ComponentLink4Description="URL Link1", ComponentLink4URL="Product URL:http://www.analog.com/en/ADP151/productSearch.html", DatasheetVersion="Rev. E", Iout max=200mA, Mounting Technology="Surface Mount", PackageDescription="4-Ball Wafer Level Chip Scale Package, Body 0.76 x 0.76 mm, Pitch 0.4 mm", PackageReference=CB-4-3, PackageVersion="011409-A, 01/2009", Packing=Reel, partnumber=ADP151ACBZ-1.1-R7, Vin (max) (V)=5.5, Vin (min) (V)=2.2

## Via types
v1: diameter 0.3, hole 0.15, Top to Bottom, 213 vias
v2: diameter 0.4, hole 0.2, Top to Bottom, 53 vias
v3: diameter 3, hole 1.9, Top to Bottom, 4 vias

## Nets (pads, with @x,y where several pads share a name; then routed paths per layer and width w, separated by ;. In a path a pad name is that pad's centre, name@x,y a point inside that pad or via, vN(x,y) a via of type N, cw(c..) or ccw(c..) an arc to the next point about the centre after c; other vN are vias at no path point)
+1.1: C42.2 C43.2 C44.2 C45.2 C46.2 C47.2 C48.2 C49.2 C50.2 C51.2 C52.2 C53.2 C54.2 C55.2 C56.2 C57.2 C58.2 C59.2 C60.2 C61.2 C62.2 C63.2 C64.2 C65.2 C66.2 C67.2 C68.2 C69.2 C70.2 C71.2 C72.2 C73.2 C74.2 C75.2 C76.2 C77.2 C78.2 C79.2 C80.2 C81.2 C82.2 C83.2 C84.2 C85.2 C98.2 C110.2 C111.2 FB1.1 FB2.2 J1.4 J1.5 J1.6 U1.A4 U1.A13 U1.C1 U1.C2 U1.C15 U1.C16 U1.G1 U1.G2 U1.G15 U1.G16 U1.L1 U1.L2 U1.L5 U1.L12 U1.L15 U1.L16 U1.P7 U1.P8 U1.P11 U1.T9 U1.U9
  other v1: 40.5,31.5 40.5,32.5 38.5,34.5 39.5,34.5 42.5,34.5 32.5,37.5 33.5,37.5 36.5,37.5 43.5,37.5 46.5,37.5 47.5,37.5 32.5,41.5 33.5,41.5 46.5,41.5 47.5,41.5 32.5,45.5 33.5,45.5 46.5,45.5 47.5,45.5 35.5,47.5 44.5,47.5
+1.1A: C115.2 C116.2 C117.2 U1.A7 U1.D12 U5.A2
  other v1: 43.5,44.5 38.5,47.5
+1.8: C38.2 C39.2 C113.2 R1.2 R2.2 U1.N1 U1.N16 U4.A2
  other v1: 32.5,35.5 47.5,35.5
+2.9: C22.2 C23.2 C24.2 C25.2 C26.2 C27.2 C28.2 C29.2 C30.2 C31.2 C32.2 C33.2 C34.2 C35.2 C97.1 C105.1 U1.A5 U1.A8 U1.A12 U1.E5 U1.E12 U1.G5 U1.G12 U1.K5 U1.K12 U1.N5 U1.N12 U3.1 U3.2 U3.3
  other v1: 36.5,35.5 43.5,35.5 36.5,38.5 43.5,38.5 36.5,41.5 43.5,41.5 36.5,43.5 43.5,43.5 36.5,47.5 39.5,47.5 43.5,47.5
+3.3: C1.2 C2.2 C3.2 C4.2 C5.2 C6.2 C7.2 C8.2 C9.2 C10.2 C11.2 C12.2 C13.2 C14.2 C15.2 C16.2 C17.2 C18.2 C19.2 C20.2 C21.2 C86.1 C96.1 C100.1 U1.A3 U1.A9 U1.A14 U1.C5 U1.C12 U1.D5 U1.D6 U1.D7 U1.D10 U1.D11 U1.F5 U1.F12 U1.H5 U1.H12 U1.M5 U1.M12 U1.P5 U1.P12 U2.1 U2.2 U2.3
  other v1: 36.5,34.5 43.5,34.5 36.5,36.5 43.5,36.5 36.5,40.5 43.5,40.5 36.5,42.5 43.5,42.5 36.5,44.5 37.5,44.5 38.5,44.5 41.5,44.5 42.5,44.5 36.5,45.5 43.5,45.5 34.5,47.5 40.5,47.5 45.5,47.5
+5: C112.2 C114.2 J1.1 J1.2 J1.3 U4.A1 U5.A1
D0_N: J1.59 U1.R2
  other v1: 33.5,33.5
D0_P: J1.57 U1.R1
  other v1: 32.5,33.5
D1_N: J1.54 U1.T3
  other v1: 34.5,32.5
D1_P: J1.52 U1.U3
  other v1: 34.5,31.5
D2_N: J1.53 U1.T4
  other v1: 35.5,32.5
D2_P: J1.51 U1.U4
  other v1: 35.5,31.5
D3_N: J1.48 U1.T5
  other v1: 36.5,32.5
D3_P: J1.46 U1.U5
  other v1: 36.5,31.5
D4_N: J1.47 U1.T11
  other v1: 42.5,32.5
D4_P: J1.45 U1.U11
  other v1: 42.5,31.5
D5_N: J1.42 U1.T12
  other v1: 43.5,32.5
D5_P: J1.40 U1.U12
  other v1: 43.5,31.5
D6_N: J1.41 U1.T13
  other v1: 44.5,32.5
D6_P: J1.39 U1.U13
  other v1: 44.5,31.5
D7_N: J1.36 U1.T14
  other v1: 45.5,32.5
D7_P: J1.34 U1.U14
  other v1: 45.5,31.5
DC_N: J1.60 U1.T7
  other v1: 38.5,32.5
DC_P: J1.58 U1.U7
  other v1: 38.5,31.5
EN2V9: U3.5
EN3V3: U2.5
GND: C1.1 C2.1 C3.1 C4.1 C5.1 C6.1 C7.1 C8.1 C9.1 C10.1 C11.1 C12.1 C13.1 C14.1 C15.1 C16.1 C17.1 C18.1 C19.1 C20.1 C21.1 C22.1 C23.1 C24.1 C25.1 C26.1 C27.1 C28.1 C29.1 C30.1 C31.1 C32.1 C33.1 C34.1 C35.1 C36.1 C37.1 C38.1 C39.1 C40.1 C41.1 C42.1 C43.1 C44.1 C45.1 C46.1 C47.1 C48.1 C49.1 C50.1 C51.1 C52.1 C53.1 C54.1 C55.1 C56.1 C57.1 C58.1 C59.1 C60.1 C61.1 C62.1 C63.1 C64.1 C65.1 C66.1 C67.1 C68.1 C69.1 C70.1 C71.1 C72.1 C73.1 C74.1 C75.1 C76.1 C77.1 C78.1 C79.1 C80.1 C81.1 C82.1 C83.1 C84.1 C85.1 C86.2 C87.1 C88.1 C89.1 C90.1 C91.1 C92.1 C93.1 C94.1 C95.1 C96.2 C97.2 C98.1 C99.2 C100.2 C101.1 C102.1 C103.1 C104.2 C105.2 C106.1 C107.1 C108.1 C109.1 C110.1 C111.1 C112.1 C113.1 C114.1 C115.1 C116.1 C117.1 J1.11 J1.12 J1.13 J1.14 J1.31 J1.32 J1.37 J1.38 J1.43 J1.44 J1.49 J1.50 J1.55 J1.56 J1.S1 J1.S2 J1.S3 J1.S4 R22.1 R24.1 U1.A1 U1.A6 U1.A16 U1.B3 U1.B4 U1.B5 U1.B8 U1.B9 U1.B12 U1.B13 U1.B14 U1.C3 U1.C4 U1.C13 U1.C14 U1.D1 U1.D2 U1.D3 U1.D4 U1.D8 U1.D9 U1.D13 U1.D14 U1.D15 U1.D16 U1.E2 U1.E3 U1.E4 U1.E6 U1.E7 U1.E8 U1.E9 U1.E10 U1.E11 U1.E13 U1.E14 U1.F3 U1.F4 U1.F13 U1.F14 U1.G3 U1.G4 U1.G13 U1.G14 U1.H1 U1.H2 U1.H3 U1.H4 U1.H13 U1.H15 U1.H16 U1.J3 U1.J4 U1.J5 U1.J12 U1.J13 U1.J14 U1.K3 U1.K4 U1.K13 U1.K14 U1.L3 U1.L4 U1.L13 U1.L14 U1.M1 U1.M2 U1.M3 U1.M4 U1.M8 U1.M9 U1.M13 U1.M14 U1.M15 U1.M16 U1.N2 U1.N3 U1.N4 U1.N6 U1.N7 U1.N8 U1.N9 U1.N10 U1.N11 U1.N13 U1.N14 U1.P2 U1.P3 U1.P4 U1.P6 U1.P13 U1.P14 U1.P16 U1.R3 U1.R4 U1.R5 U1.R6 U1.R7 U1.R11 U1.R12 U1.R13 U1.R14 U1.T6 U1.T8 U1.T10 U1.U1 U1.U6 U1.U8 U1.U10 U1.U16 U2.11 U3.11 U4.B2 U5.B2
  other v1: 37.5,31.5 39.5,31.5 41.5,31.5 37.5,32.5 39.5,32.5 41.5,32.5 34.5,33.5 35.5,33.5 36.5,33.5 37.5,33.5 38.5,33.5 42.5,33.5 43.5,33.5 44.5,33.5 45.5,33.5 33.5,34.5 34.5,34.5 35.5,34.5 37.5,34.5 44.5,34.5 45.5,34.5 47.5,34.5 33.5,35.5 34.5,35.5 35.5,35.5 37.5,35.5 38.5,35.5 39.5,35.5 40.5,35.5 41.5,35.5 42.5,35.5 44.5,35.5 45.5,35.5 32.5,36.5 33.5,36.5 34.5,36.5 35.5,36.5 39.5,36.5 40.5,36.5 44.5,36.5 45.5,36.5 46.5,36.5 47.5,36.5 34.5,37.5 35.5,37.5 44.5,37.5 45.5,37.5 34.5,38.5 35.5,38.5 44.5,38.5 45.5,38.5 34.5,39.5 35.5,39.5 36.5,39.5 43.5,39.5 44.5,39.5 45.5,39.5 32.5,40.5 33.5,40.5 34.5,40.5 35.5,40.5 44.5,40.5 46.5,40.5 47.5,40.5 34.5,41.5 35.5,41.5 44.5,41.5 45.5,41.5 34.5,42.5 35.5,42.5 44.5,42.5 45.5,42.5 33.5,43.5 34.5,43.5 35.5,43.5 37.5,43.5 38.5,43.5 39.5,43.5 40.5,43.5 41.5,43.5 42.5,43.5 44.5,43.5 45.5,43.5 32.5,44.5 33.5,44.5 34.5,44.5 35.5,44.5 39.5,44.5 40.5,44.5 44.5,44.5 45.5,44.5 46.5,44.5 47.5,44.5 34.5,45.5 35.5,45.5 44.5,45.5 45.5,45.5 34.5,46.5 35.5,46.5 36.5,46.5 39.5,46.5 40.5,46.5 43.5,46.5 44.5,46.5 45.5,46.5 37.5,47.5
INCK: J1.35 U1.P1
  other v1: 32.5,34.5
NetC101_2: C101.2 R21.2 U2.7
NetC102_2: C102.2 U2.4
NetC103_2: C103.2 U2.8
NetC106_2: C106.2 R23.2 U3.7
NetC107_2: C107.2 U3.4
NetC108_2: C108.2 U3.8
NetJ1_8: J1.8
NetJ1_9: J1.9
NetJ1_10: J1.10
NetR3_2: R3.2 U1.K15
  other v1: 46.5,38.5
NetR4_1: R4.1 U1.K2
  other v1: 33.5,38.5
NetR5_2: R5.2 U1.K16
  other v1: 47.5,38.5
NetR6_1: R6.1 U1.J1
  other v1: 32.5,39.5
NetR7_1: R7.1 U1.J2
  other v1: 33.5,39.5
NetR8_1: R8.1 U1.F16
  other v1: 47.5,42.5
NetR21_1: R21.1 R22.2 U2.6
NetR23_1: R23.1 R24.2 U3.6
NetU4_B1: U4.B1
NetU5_B1: U5.B1
OMODE: J1.29 U1.R16
  other v1: 47.5,33.5
SCK: J1.16 U1.J15
  other v1: 46.5,39.5
SDI: J1.15 U1.J16
  other v1: 47.5,39.5
SDO: J1.17 R8.2
SLAMODE0: J1.20 U1.N15
  other v1: 46.5,35.5
SLAMODE1: J1.25 U1.P15
  other v1: 46.5,34.5
SLAMODE2: J1.27 U1.R15
  other v1: 46.5,33.5
TOUT0: J1.19 R7.2
TOUT1: J1.21 R6.2
TOUT2: J1.23 R4.2
VCP1: C88.2 C89.2 C90.2 C91.2 U1.A10 U1.A11 U1.B11
  other v1: 42.5,46.5 41.5,47.5 42.5,47.5
VCP2: C92.2 C93.2 C94.2 C95.2 U1.B6 U1.B7 U1.B10 U1.C6 U1.C7 U1.C8 U1.C9 U1.C10 U1.C11
  other v1: 37.5,45.5 38.5,45.5 39.5,45.5 40.5,45.5 41.5,45.5 42.5,45.5 37.5,46.5 38.5,46.5 41.5,46.5
VDDLIF: C36.2 C37.2 C87.2 FB1.2 U1.R8 U1.R9 U1.R10
  other v1: 39.5,33.5 40.5,33.5 41.5,33.5
VDDLPLA: C40.2 C41.2 C109.2 FB2.1 U1.P9 U1.P10
  other v1: 40.5,34.5 41.5,34.5
VIN: C99.1 C104.1 U2.9 U2.10 U3.9 U3.10
XCE: J1.18 U1.F15
  other v1: 46.5,42.5
XCLR: J1.33 U1.K1
  other v1: 32.5,38.5
XHS: J1.28 R2.1 R3.1
XMASTER: J1.22 U1.E16
  other v1: 47.5,43.5
XTRIG1: J1.26 U1.E1
  other v1: 32.5,43.5
XTRIG2: J1.24 U1.F2
  other v1: 33.5,42.5
XVS: J1.30 R1.1 R5.1
pads on no net: J1.7 U1.E15 U1.F1 U1.F6 U1.F7 U1.F8 U1.F9 U1.F10 U1.F11 U1.H14 U1.M6 U1.M7 U1.M10 U1.M11
copper on no net: | length 106.3
  Bottom w1: v3@26.5,27.5 ccw(c27.5,27.5) 27.5,26.5 52.5,26.5 ccw(c52.5,27.5) 53.5,27.5 v2(53.5,52.5) ccw(c52.5,52.5) 52.5,53.5 v2(27.5,53.5) ccw(c27.5,52.5) v2(26.5,52.5) v3@26.5,27.5
  other v2: 27,26.5 29,26.5 31,26.5 33,26.5 35,26.5 37,26.5 39,26.5 41,26.5 43,26.5 45,26.5 47,26.5 49,26.5 51,26.5 53,26.5 26.5,28.5 53.5,28.5 26.5,30.5 53.5,30.5 26.5,32.5 53.5,32.5 26.5,34.5 53.5,34.5 26.5,36.5 53.5,36.5 26.5,38.5 53.5,38.5 26.5,40.5 53.5,40.5 26.5,42.5 53.5,42.5 26.5,44.5 53.5,44.5 26.5,46.5 53.5,46.5 26.5,48.5 53.5,48.5 26.5,50.5 53.5,50.5 29.5,53.5 31.5,53.5 33.5,53.5 35.5,53.5 37.5,53.5 39.5,53.5 41.5,53.5 43.5,53.5 45.5,53.5 47.5,53.5 49.5,53.5 51.5,53.5
  other v3: 27.5,27.5 52.5,27.5 27.5,52.5 52.5,52.5

## Polygon pours and split planes (outlines as drawn)
GND on Top "NONET_L01_P000" (solid, shelved, pour order 0): 26,27.5 26,52.5 cw(c27.5,52.5) 27.5,54 52.5,54 cw(c52.5,52.5) 54,52.5 54,27.5 cw(c52.5,27.5) 52.5,26 27.5,26 cw(c27.5,27.5)
GND on Bottom "NONET_L10_P003" (solid, shelved, pour order 3): 26,27.5 26,52.5 cw(c27.5,52.5) 27.5,54 52.5,54 cw(c52.5,52.5) 54,52.5 54,27.5 cw(c52.5,27.5) 52.5,26 27.5,26 cw(c27.5,27.5)
VCP1 on Bottom "NONET_L10_P002" (solid, shelved, pour order 2): 41,47 43,47 43,48 44,48 44,49 40,49 40,48 41,48
VCP2 on Bottom "NONET_L10_P001" (solid, shelved, pour order 1): 37,47 37,45 42,45 42,47 41,47 41,46 39,46 39,47
GND on L3 (GND) "NONET_L03_P006" (solid, remove dead copper, shelved, pour order 6): 26,27.5 26,52.5 cw(c27.5,52.5) 27.5,54 52.5,54 cw(c52.5,52.5) 54,52.5 54,27.5 cw(c52.5,27.5) 52.5,26 27.5,26 cw(c27.5,27.5)
VDDLIF on L3 (GND) "NONET_L03_P005" (solid, shelved, pour order 5): 39,34 46.5,34 46.5,29 39,29
VDDLPLA on L3 (GND) "NONET_L03_P004" (solid, shelved, pour order 4): 46.5,31 43,31 43,34 40,34 40,35 48,35 48,30 49.5,30 49.5,29 46.5,29

## Silkscreen, mask and mechanical layers (free items; w line width, h text height)
Top Overlay:
  drawing of 4 lines, arcs and shapes, not listed
  text "(0,2048)" at 30.847,29 h0.81 r90
  text "(0,0)" at 49.347,29 h0.81 r90
Bottom Overlay:
  text "IMX547 Module" at 50.7,28.008 h0.81
  text "860-0000 Rev 1" at 50.7,27.008 h0.81
Bottom Solder:
  lines w1: 26.5,27.5 ccw(c27.5,27.5) 27.5,26.5 52.5,26.5 ccw(c52.5,27.5) 53.5,27.5 53.5,52.5 ccw(c52.5,52.5) 52.5,53.5 27.5,53.5 ccw(c27.5,52.5) 26.5,52.5 26.5,27.5
Board Outline:
  the board outline again, w0.1